# Altium PCB DC-DC-AJ39_2023-06-08.pcbdoc
Units mm, origin at the board's own origin, x right, y up, seen from the top; angles counter-clockwise.
Board outline 75.91 x 43.81 mm, 2 copper layers (Top Layer, Bottom Layer); 1 components, 0 nets, 8 pads, 0 vias.
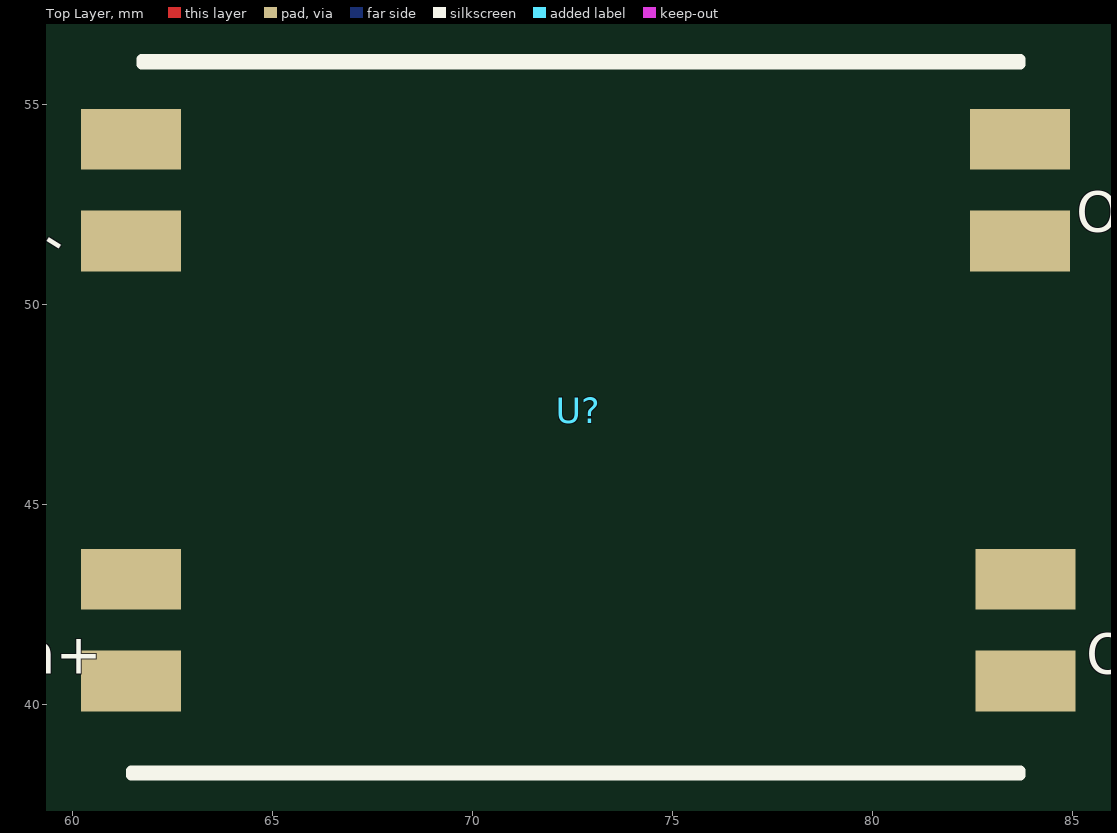
[diagram p0: Top Layer view]
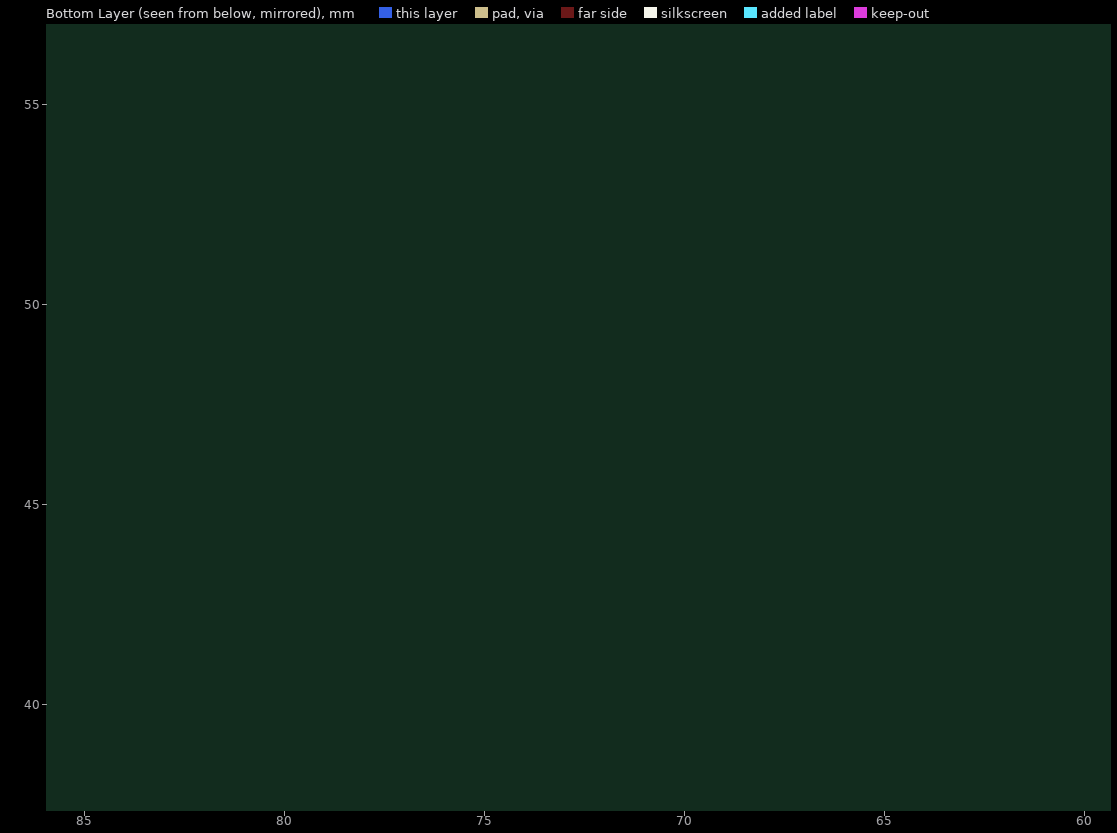
[diagram p1: Bottom Layer view, seen from below]

## Layer stack, top to bottom
Top Layer: signal copper (thickness not stored)
Dielectric: dielectric 0.32, FR-4, Dk 4.8
Bottom Layer: signal copper (thickness not stored)

## Board outline
101.314,25.4 25.4,25.4 25.4,69.215 101.314,69.215

## Components (designator, comment, footprint, x,y, rotation, side; value= is the part's Value field where it differs from the comment)
U? "DC-DC-AJ39" DC-DC-AJ39 62.722,47.18 r0 top

## Footprints (in the part's own frame and the unit in brackets; to place one, negate y for a bottom-side part, rotate by r counter-clockwise, add the part's x,y. Pads: shape width x height; smd on the part's side, far side on the other; paste and mask are expansions set on the pad)
DC-DC-AJ39 [mm]
  rect 2.5x1.524 smd paste+0 mask+0.051: 1(-1.254,6.954) 2(-1.254,4.414) 3(-1.254,-4.046) 4(-1.254,-6.586) 5(21.098,-6.586) 6(21.098,-4.046) 7(20.971,4.414) 8(20.971,6.954)
  silkscreen extent -1.25,-8.95 20.97,8.95

## Nets (pads, with @x,y where several pads share a name; then routed paths per layer and width w, separated by ;. In a path a pad name is that pad's centre, name@x,y a point inside that pad or via, vN(x,y) a via of type N, cw(c..) or ccw(c..) an arc to the next point about the centre after c; other vN are vias at no path point)
pads on no net: U?.1 U?.2 U?.3 U?.4 U?.5 U?.6 U?.7 U?.8

## Silkscreen, mask and mechanical layers (free items; w line width, h text height)
Document:
  lines w0.003: 63.357,47.307 63.357,47.308

## Text inside footprints (layer, text, board x,y; h text height)
U?: Top Overlay "In-" at 58.028,52.027 h1 r328; Top Overlay "Out-" at 85.09,51.824 h1; Top Overlay "In+" at 58.293,40.775 h1; Top Overlay "Out+" at 85.344,40.775 h1; Top Overlay "DC-DC AJ39" at 38.1,40.767 h2.03